# EAGLE board PE10 (EAGLE 9.6.2)
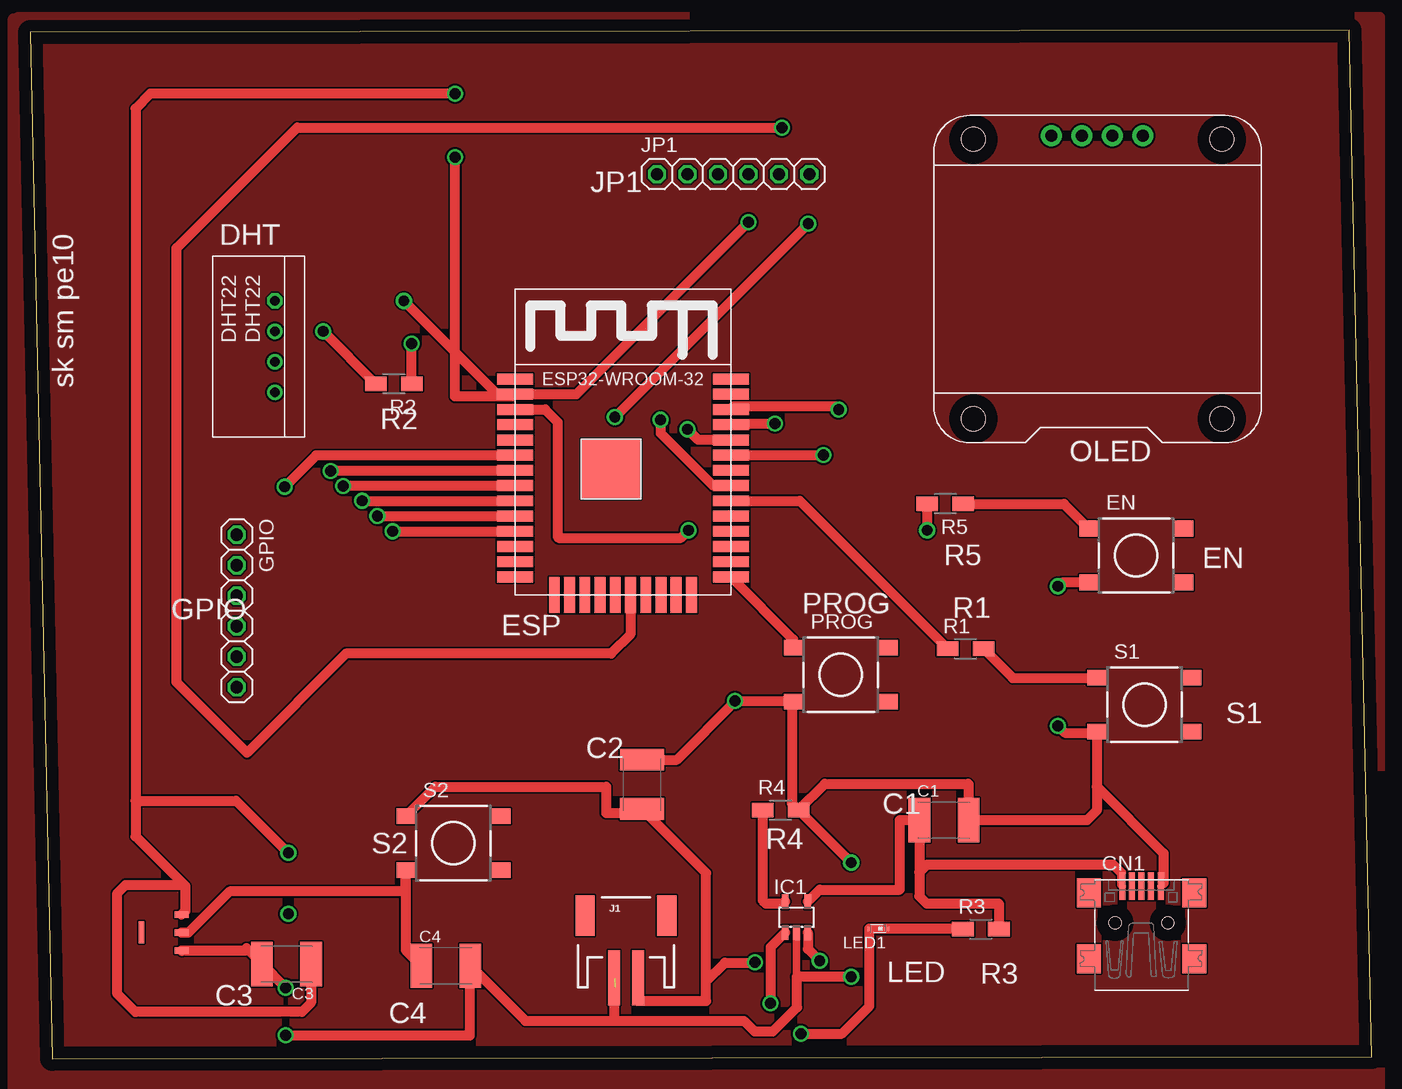
[diagram p0: board, top side]
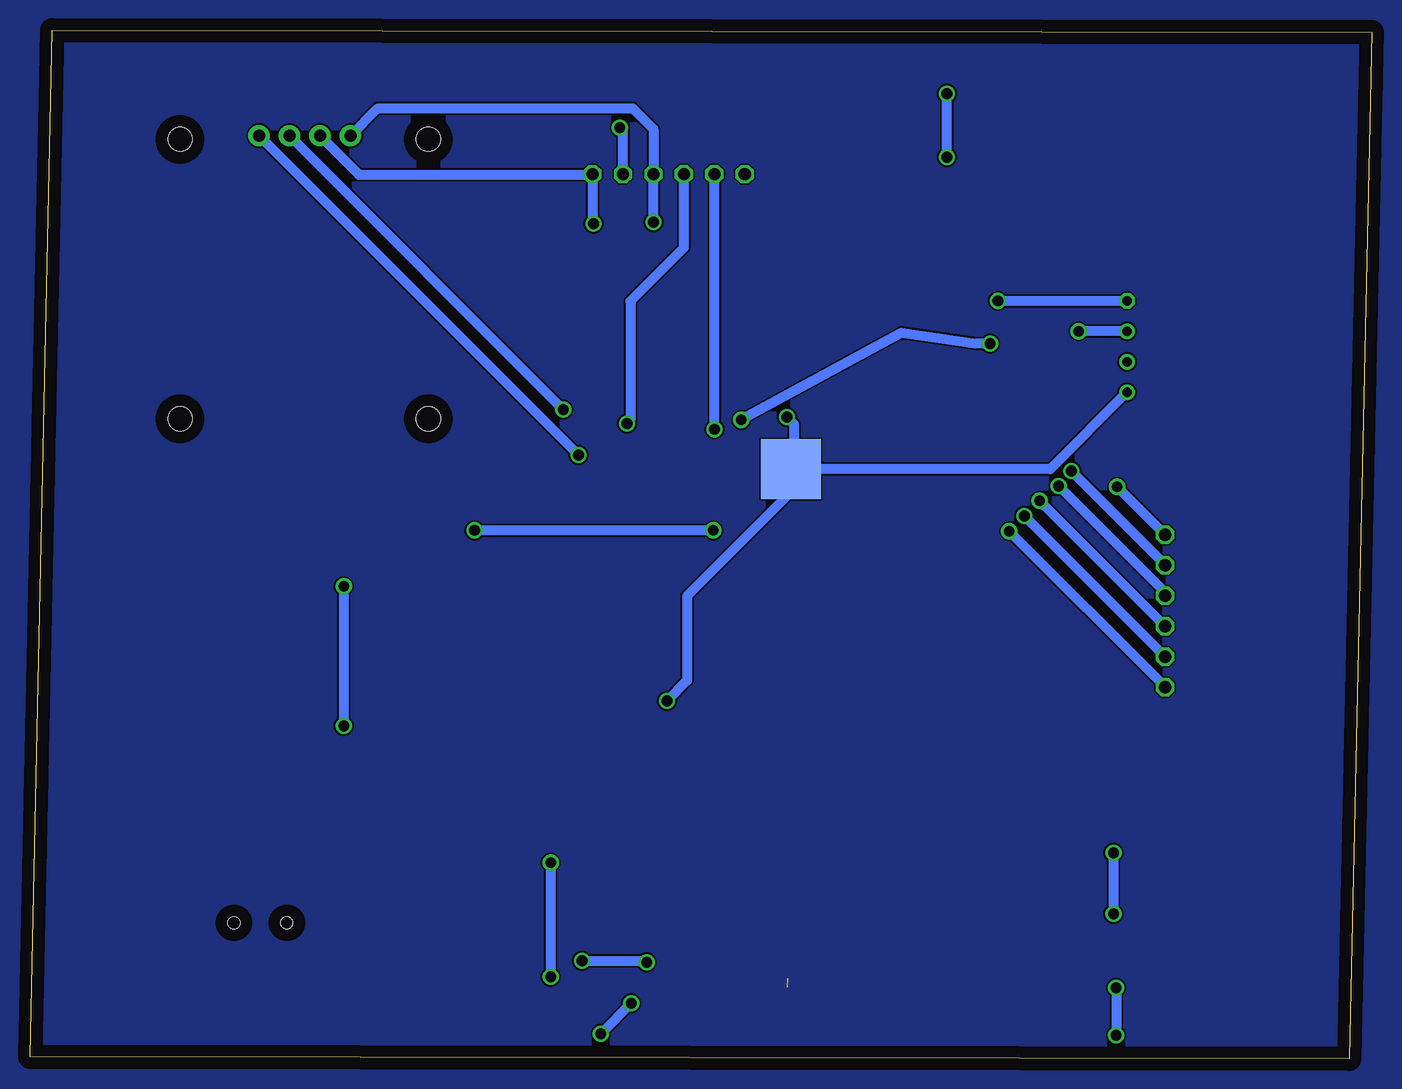
[diagram p1: board, bottom side, seen from below]

Size 111.86 x 85.79 mm. Coordinates in mm from the lower left corner, seen from the top.
Outline: 1.87,0 111.86,0.17 109.99,85.79 0,85.62 1.87,0
Copper layers (1*16): Top 0.035mm / dielectric 1.5mm / Bottom 0.035mm
Design rules "default": minimum track width 6mil, minimum drill 0.35mm, track to track 6mil, track to pad 6mil, pad to pad 6mil, via to via 6mil, smd to smd 6mil, copper to edge 40mil, drill to drill 6mil, minimum pad ring 10mil, minimum via ring 8mil, stop-mask expansion 4mil, vias tented up to drill 0mil, thermal gap 10mil

## Footprints (pad centres in the part's own frame; a part is rotated, then mirrored left to right if it is on the bottom)
C1812K = smd 1.8 x 3.7: 1 -2.05,0; 2 2.05,0
USB-MINIB = smd 0.5 x 2.308: D+ 0,4.064; D- -0.8,4.064; GND 1.6,4.064; ID 0.8,4.064; VBUS -1.6,4.064 | smd 2 x 2.4: GND1 -4.4,-2; GND2 -4.4,3.5; GND3 4.4,3.5; GND4 4.4,-2 | hole 1: -2.2,1; 2.2,1
RHT03_DHT-22 = drill 0.8: DATA -1.27,0; GND 3.81,0; NULL 1.27,0 | drill 0.8 octagon: VDD -3.81,0
DTSM-6 = smd 1.55 x 1.3: 1 -3.975,2.25; 2 3.975,2.25; 3 -3.975,-2.25; 4 3.975,-2.25
1X06 = drill 1.016 octagon: 1 -6.35,0; 2 -3.81,0; 3 -1.27,0; 4 1.27,0; 5 3.81,0; 6 6.35,0
SOT89 = smd 0.559 x 1.194: GND -1.499,-0.597; VIN 0,-0.597; VOUT 1.499,-0.597 | smd 1.829 x 0.457: P$4 0,2.743
SOT23-5L = smd 0.55 x 1.2: 1 -0.95,-1.3; 2 0,-1.3; 3 0.95,-1.3; 4 0.95,1.3; 5 -0.95,1.3
JST-2-SMD = smd 1 x 4.6: 1 -1,-3.7; 2 1,-3.7 | smd 1.6 x 3.4: NC1 -3.4,1.5; NC2 3.4,1.5
SMART-LED = smd 0.35 x 0.35: A 0,0.725; B 0,-0.725
OLED_0.96_I2C = drill 1 pad 1.778: GND -1.63,11.63; SCL 0.91,11.63; SDA 3.45,11.63; VCC -4.17,11.63 | hole 2: -10.67,-11.97; 10.03,-11.97; 10.03,11.33; -10.67,11.33
R1206W = smd 1.8 x 1.2: 1 -1.499,0; 2 1.499,0
ESP32-WROOM = smd 3 x 0.9: 3V3 0,16.74; EN 0,15.47; GND1 0,18.01; GND3 18,18.01; IO0 18,1.5; IO4 18,2.77; IO5 18,6.58; IO12 0,1.5; IO14 0,2.77; IO16 18,4.04; IO17 18,5.31; IO18 18,7.85; IO19 18,9.12; IO21 18,11.66; IO22 18,15.47; IO23 18,16.74; IO25 0,6.58; IO26 0,5.31; IO27 0,4.04; IO32 0,9.12; IO33 0,7.85; IO34 0,11.66; IO35 0,10.39; NC 18,10.39; RX 18,12.93; SENSOR_VN 0,12.93; SENSOR_VP 0,14.2; TX 18,14.2 | smd 0.9 x 3: CLK 9.635,0; CMD 8.365,0; GND2 3.285,0; IO2 14.715,0; IO13 4.555,0; IO15 13.445,0; SD0 10.905,0; SD1 12.175,0; SD2 5.825,0; SD3 7.095,0 | smd 5 x 5: GND4 8,10.5 | smd 5 x 5 bottom: GND5 8,10.5

## Placement (x,y rotation side)
C1  4.7UF  [C1812K]  76.19,19.91 0 top
C2  4.7uF  [C1812K]  51.02,22.9 90 top
C3  10uF  [C1812K]  21.38,7.93 180 top
C4  10uF  [C1812K]  34.67,7.77 0 top
CN1  CN1  [USB-MINIB]  92.65,10.35 0 top
DHT22  DHT22  [RHT03_DHT-22]  20.41,59.4 270 top
EN  DTSM-6  [DTSM-6]  92.22,41.98 0 top
GPIO  [1X06]  17.23,37.35 270 top
HT7333-7  HT7333  [SOT89]  12.04,10.55 90 top
IC1  MCP73831/OT  [SOT23-5L]  63.89,11.83 0 top
J1  5V  [JST-2-SMD]  49.68,10.46 0 top
JP1  JP1  [1X06]  58.62,73.77 0 top
LED1  RED  [SMART-LED]  70.7,10.86 90 top
OLED0.96  OLED_0.96_I2C  [OLED_0.96_I2C]  89.32,65.34 0 top
PROG  DTSM-6  [DTSM-6]  67.58,32.04 0 top
R1  10k  [R1206W]  78.01,34.2 0 top
R2  10k  [R1206W]  30.32,56.28 180 top
R3  470  [R1206W]  79.27,10.82 0 top
R4  2K  [R1206W]  62.57,20.76 0 top
R5  10k  [R1206W]  76.3,46.28 180 top
S1  DTSM-6  [DTSM-6]  92.91,29.54 0 top
S2  DTSM-6  [DTSM-6]  35.3,17.99 0 top
U$1  ESP32-WROOM  [ESP32-WROOM]  40.42,38.68 0 top

## Library data of the parts
C1-C4 = rcl; SPICEPREFIX: C
CN1 GPIO IC1 JP1 LED1 = adafruit
DHT22 = RHT03_DHT-22_AM2302; PROD_ID: SEN-10167
EN PROG S1 S2 = switch-tact
HT7333-7 = HT7333_SOT89
J1 = SparkFun-Connectors; PROD_ID: CONN-11443; SF_ID: PRT-08612
OLED0.96 = tft_1_8_1_44_oled_0_96
R1-R5 = rcl; SPICEPREFIX: R
U$1 = ESP32

## Nets
0: C1.2 C2.2 C3.2 C4.2 CN1.GND DHT22.GND EN.3 HT7333-7.GND IC1.2 J1.1 JP1.6 OLED0.96.GND PROG.3 R4.2 S1.3 U$1.GND5
3V3: C3.1 DHT22.VDD HT7333-7.VOUT JP1.4 OLED0.96.VCC U$1.3V3
18: R1.1 U$1.IO18
19: R2.1 U$1.IO19
CTS1: JP1.5 U$1.CLK
GPIO1: GPIO.1 U$1.IO34
GPIO2: GPIO.2 U$1.IO35
GPIO3: GPIO.3 U$1.IO32
GPIO4: GPIO.4 U$1.IO33
GPIO5: GPIO.5 U$1.IO25
GPIO6: GPIO.6 U$1.IO26
N$1: OLED0.96.SCL U$1.IO22
N$2: OLED0.96.SDA U$1.IO21
N$3: DHT22.DATA R2.2
N$4: R1.2 S1.1
N$5: C1.1 CN1.VBUS IC1.4 R3.2
N$6: C4.1 HT7333-7.VIN S2.3
N$7: IC1.1 LED1.A LED1.B R3.1
N$8: C2.1 IC1.3 J1.2 S2.1
N$10: EN.1 R5.1
N$12: IC1.5 R4.1
N$13: R5.2 U$1.EN
PROG: PROG.1 U$1.IO0
RX: JP1.3 U$1.TX
TX: JP1.2 U$1.RX

## Tracks (layer width: path | path; a pad name or v marks a point on that pad's centre or on a via)
0  (via drill 0.9)  (1 unrouted)
  Top 0.61: IC1.2 63.92,10.5 63.92,6.85 | 94.49,14.65 CN1.GND
  Top 0.813: v48.76,53.53 v64.88,69.65 | 19.15,8.11 C3.2 | 12.68,9.01 HT7333-7.GND 18.21,9.05 | 18.03,9.24 18.21,9.05 | 18.21,9.05 C3.2 | R4.2 66.26,22.95 78.2,22.95 78.24,22.91 C1.2 88.12,19.91 88.93,20.72 88.93,22.72 | R4.2 v68.45,16.38 | v68.45,6.85 63.92,6.85 63.95,6.82 63.95,4.3 61.94,2.29 60.4,2.29 59.51,3.18 48.65,3.18 | 88.93,22.72 S1.3 88.82,27.19 86.29,27.19 v85.7,27.77 | EN.3 86.01,39.73 v85.7,39.42 | 58.83,29.86 v58.77,29.86 63.54,29.86 PROG.3 63.51,29.69 63.51,21.32 R4.2 | C2.2 53.93,24.95 58.83,29.86 | 58.83,29.86 58.89,29.91 | 48.77,5.98 48.77,5.62 | C3.2 v21.32,5.95 | v21.32,1.98 36.68,1.98 36.68,7.35 36.49,7.53 C4.2 41.31,3.18 48.65,3.18 | 48.72,6.72 J1.1 48.68,3.21 48.65,3.18 | 88.93,22.72 94.49,17.16 94.49,14.65
  Bottom 0.813: OLED0.96.GND 84.44,73.72 65,73.72 JP1.6 | v48.76,53.53 48.19,52.95 48.19,49.42 U$1.GND5 | JP1.6 | JP1.6 64.96,69.73 v64.88,69.65 | v68.45,16.38 v68.45,6.85 | v85.7,39.42 v85.7,27.77 | U$1.GND5 48.42,47.26 57.08,38.6 57.08,31.54 v58.77,29.86 | v21.32,5.95 v21.32,1.98 | U$1.GND5 26.81,49.18 DHT22.GND
3V3  (via drill 0.9)
  Top 0.813: U$1.3V3 40.3,55.31 39.07,55.31 v31.17,63.21 | U$1.3V3 45.55,55.42 v59.89,69.76 | U$1.3V3 40.24,55.24 35.43,55.24 v35.43,75.18 | v35.43,80.48 | v35.43,80.48 10.04,80.48 8.79,79.24 8.79,21.54 | 12.85,14.5 8.79,18.56 8.79,21.54 | HT7333-7.VOUT 12.94,12.35 12.94,14.41 12.85,14.5 | C3.1 23.43,4.69 22.68,3.93 8.78,3.93 7.28,5.42 7.28,13.82 7.97,14.5 12.85,14.5 | 8.79,21.54 17.17,21.54 v21.53,17.18
  Bottom 0.813: OLED0.96.VCC 82.86,79.26 61.63,79.26 59.89,77.52 JP1.4 v59.89,69.76 | DHT22.VDD v31.17,63.21 | v35.43,75.18 v35.43,80.48 | v21.53,17.18 v21.53,12.1
18
  Top 0.813: U$1.IO18 64.18,46.53 R1.1
19  (via drill 0.9)
  Top 0.813: R2.1 v31.82,59.65 | U$1.IO19 58.4,47.82 56.93,47.82 52.57,52.18 v52.57,53.28
  Bottom 0.813: v31.82,59.65 32.96,59.65 39.22,60.56 52.5,53.36 v52.57,53.28
CTS1  (via drill 0.9)
  Top 0.813: U$1.CLK 50.06,35.4 48.45,33.8 26.35,33.8 18.09,25.54 12.23,31.4 12.23,67.6 22.28,77.65 v62.7,77.65
  Bottom 0.813: JP1.5 62.43,77.38 v62.7,77.65
GND
  pour Top: -1.01,86.89 112.54,86.89 112.54,-3.91 -1.43,-3.91 -1.43,86.74 -1.34,86.74
  pour Bottom: -3.4,87.73 -3.4,-6.82 116.33,-6.82 116.33,87.99 -3.44,87.99
GPIO1  (via drill 0.9)
  Top 0.813: U$1.IO34 40.39,50.32 23.85,50.32 v21.23,47.7
  Bottom 0.813: GPIO.1 v21.23,47.7
GPIO2  (via drill 0.9)
  Top 0.813: v25.05,49.03 40.37,49.03 U$1.IO35
  Bottom 0.813: v25.05,49.03 17.23,41.21 GPIO.2
GPIO3  (via drill 0.9)
  Top 0.813: U$1.IO32 40.39,47.78 v26.1,47.78
  Bottom 0.813: v26.1,47.78 17.23,38.91 GPIO.3
GPIO4  (via drill 0.9)
  Top 0.813: v27.69,46.53 U$1.IO33
  Bottom 0.813: GPIO.4 v27.69,46.53
GPIO5  (via drill 0.9)
  Top 0.813: v28.96,45.26 U$1.IO25
  Bottom 0.813: GPIO.5 v28.96,45.26
GPIO6  (via drill 0.9)
  Top 0.813: v30.23,43.99 U$1.IO26
  Bottom 0.813: GPIO.6 v30.23,43.99
N$1  (via drill 0.9)
  Top 0.813: U$1.IO22 58.67,54.4 67.16,54.4 v67.41,54.15
  Bottom 0.813: v67.41,54.15 OLED0.96.SCL
N$2  (via drill 0.9)
  Top 0.813: U$1.IO21 v66.14,50.34
  Bottom 0.813: v66.14,50.34 OLED0.96.SDA
N$3  (via drill 0.9)
  Top 0.813: v24.44,60.67 R2.2
  Bottom 0.813: DHT22.DATA v24.44,60.67
N$4
  Top 0.813: R1.2 81.92,31.79 81.92,31.76 88.9,31.76 S1.1
N$5
  Top 0.61: 90.94,15.55 90.94,14.52 CN1.VBUS
  Top 0.813: 74.14,15.56 C1.1 74.13,19.92 72.51,19.92 72.51,14.14 72.49,14.11 65.83,14.11 IC1.4 | 74.14,15.56 74.14,13.57 74.74,12.98 80.76,12.98 80.77,12.97 R3.2 | 74.14,15.56 74.8,16.21 90.28,16.21 90.94,15.55
N$6
  Top 0.813: HT7333-7.VIN 13.23,10.55 16.65,13.97 31.33,13.97 S2.3 31.33,9.07 C4.1
N$7  (via drill 0.9)
  Top 0.813: v61.74,4.64 61.74,9.33 IC1.1 | R3.1 77.73,10.86 LED1.B LED1.A 69.97,4.4 67.68,2.11 v64.28,2.11
  Bottom 0.813: v61.74,4.64 v64.28,2.11
N$8  (via drill 0.9)
  Top 0.813: J1.2 50.68,4.85 56.37,4.85 56.37,6.47 | S2.1 33.79,22.7 48.03,22.7 48.03,20.51 49.99,20.51 50.1,20.63 50.8,20.63 C2.1 56.37,15.5 56.37,6.47 | v60.45,8.06 60.42,8.03 57.93,8.03 56.37,6.47 | IC1.3 64.84,9.17 v65.83,8.18
  Bottom 0.813: v65.83,8.18 60.57,8.18 v60.45,8.06
N$10
  Top 0.813: R5.1 86.19,46.28 EN.1
N$12
  Top 0.813: R4.1 61.07,13.24 61.35,12.96 62.77,12.96 IC1.5
N$13  (via drill 0.9)
  Top 0.813: U$1.EN 42.94,54.15 44,53.1 44,43.52 44.08,43.44 54.27,43.44 v54.9,44.07 | v74.8,44.07 R5.2
  Bottom 0.813: v54.9,44.07 v74.8,44.07
PROG
  Top 0.813: U$1.IO0 63.61,35 PROG.1
RX  (via drill 0.9)
  Top 0.813: U$1.TX 58.5,52.97 v62.09,52.97
  Bottom 0.813: v62.09,52.97 61.81,53.25 61.81,63.17 57.35,67.64 JP1.3
TX  (via drill 0.9)
  Top 0.813: U$1.RX 55.7,51.61 v54.81,52.5
  Bottom 0.813: v54.81,52.5 JP1.2

## Text on the board
tNames: JP1 | DHT | sk sm pe10 | R2 | OLED | R5 | EN | GPIO | PROG | R1 | ESP | S1 | C2 | C1 | R4 | S2 | LED | R3 | C3 | C4